# Altium PCB DSP_Board_AJA.PcbDoc
Units mil, origin at the board's own origin, x right, y up, seen from the top; angles counter-clockwise.
Board outline 6000 x 4000 mil, 2 copper layers (Top Layer, Bottom Layer); 126 components, 154 nets, 530 pads, 50 vias.
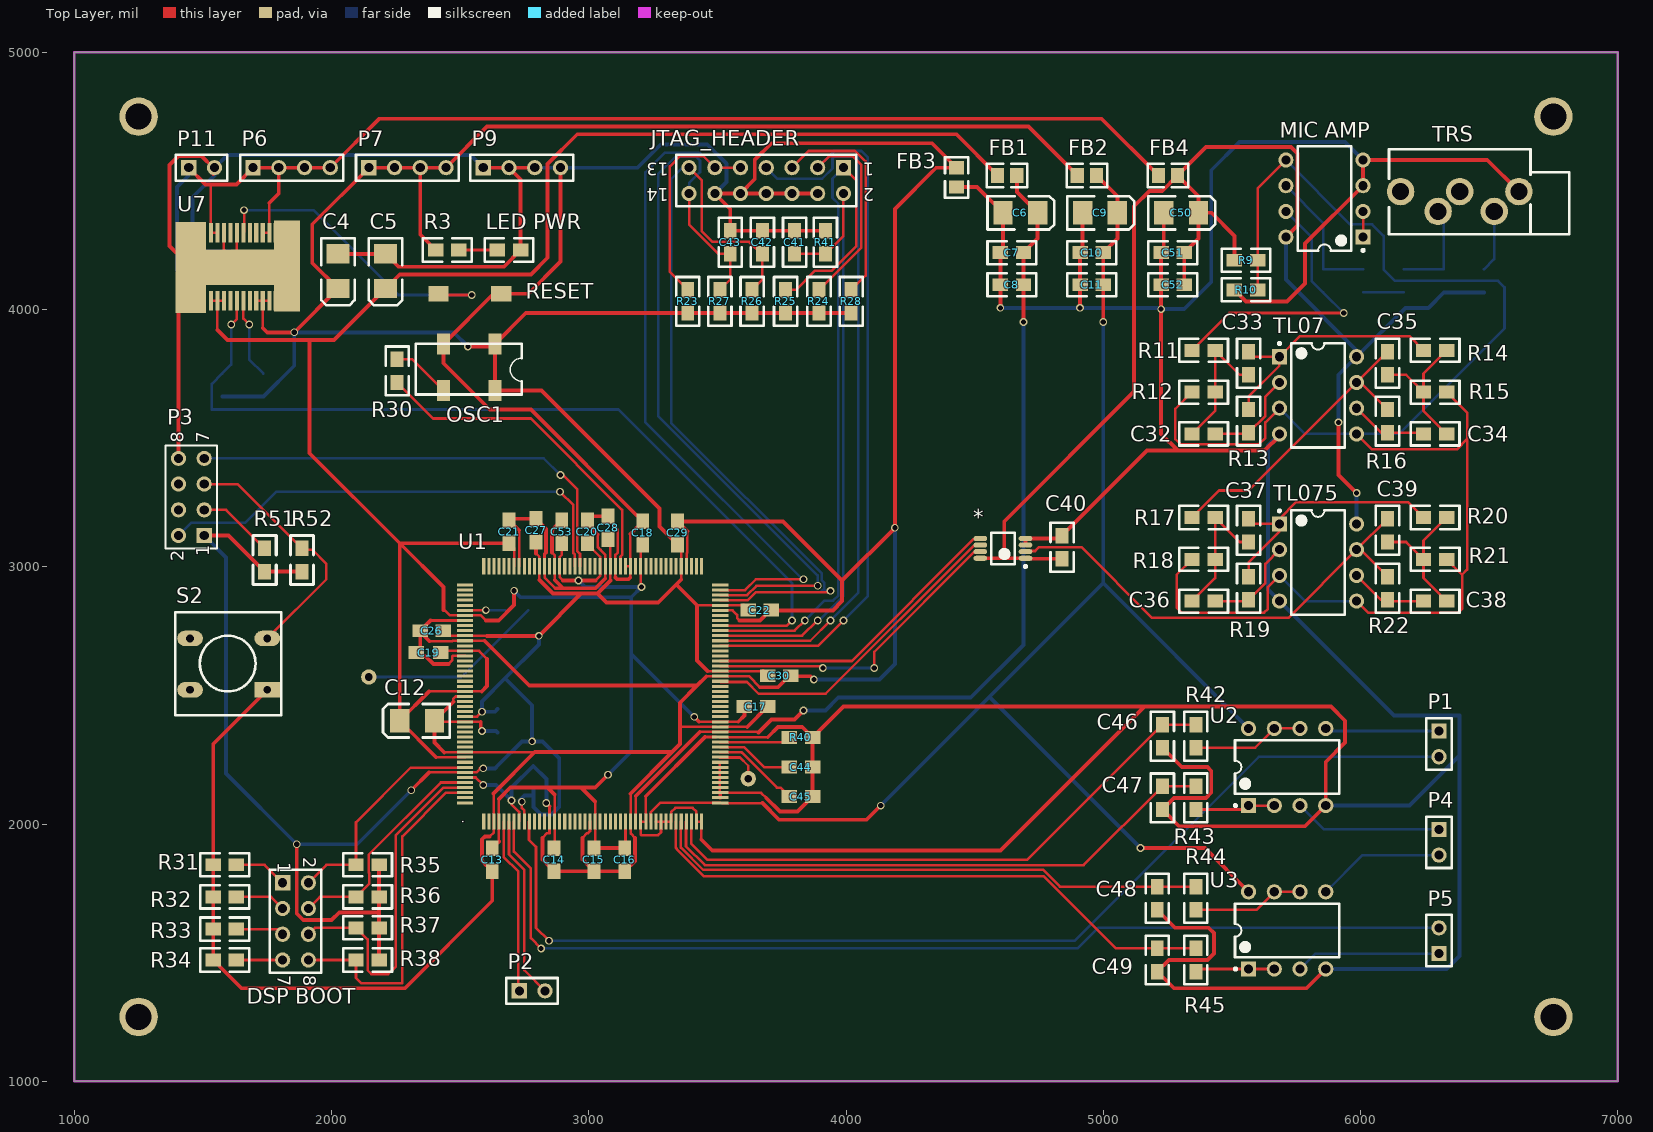
[diagram p0: Top Layer view]
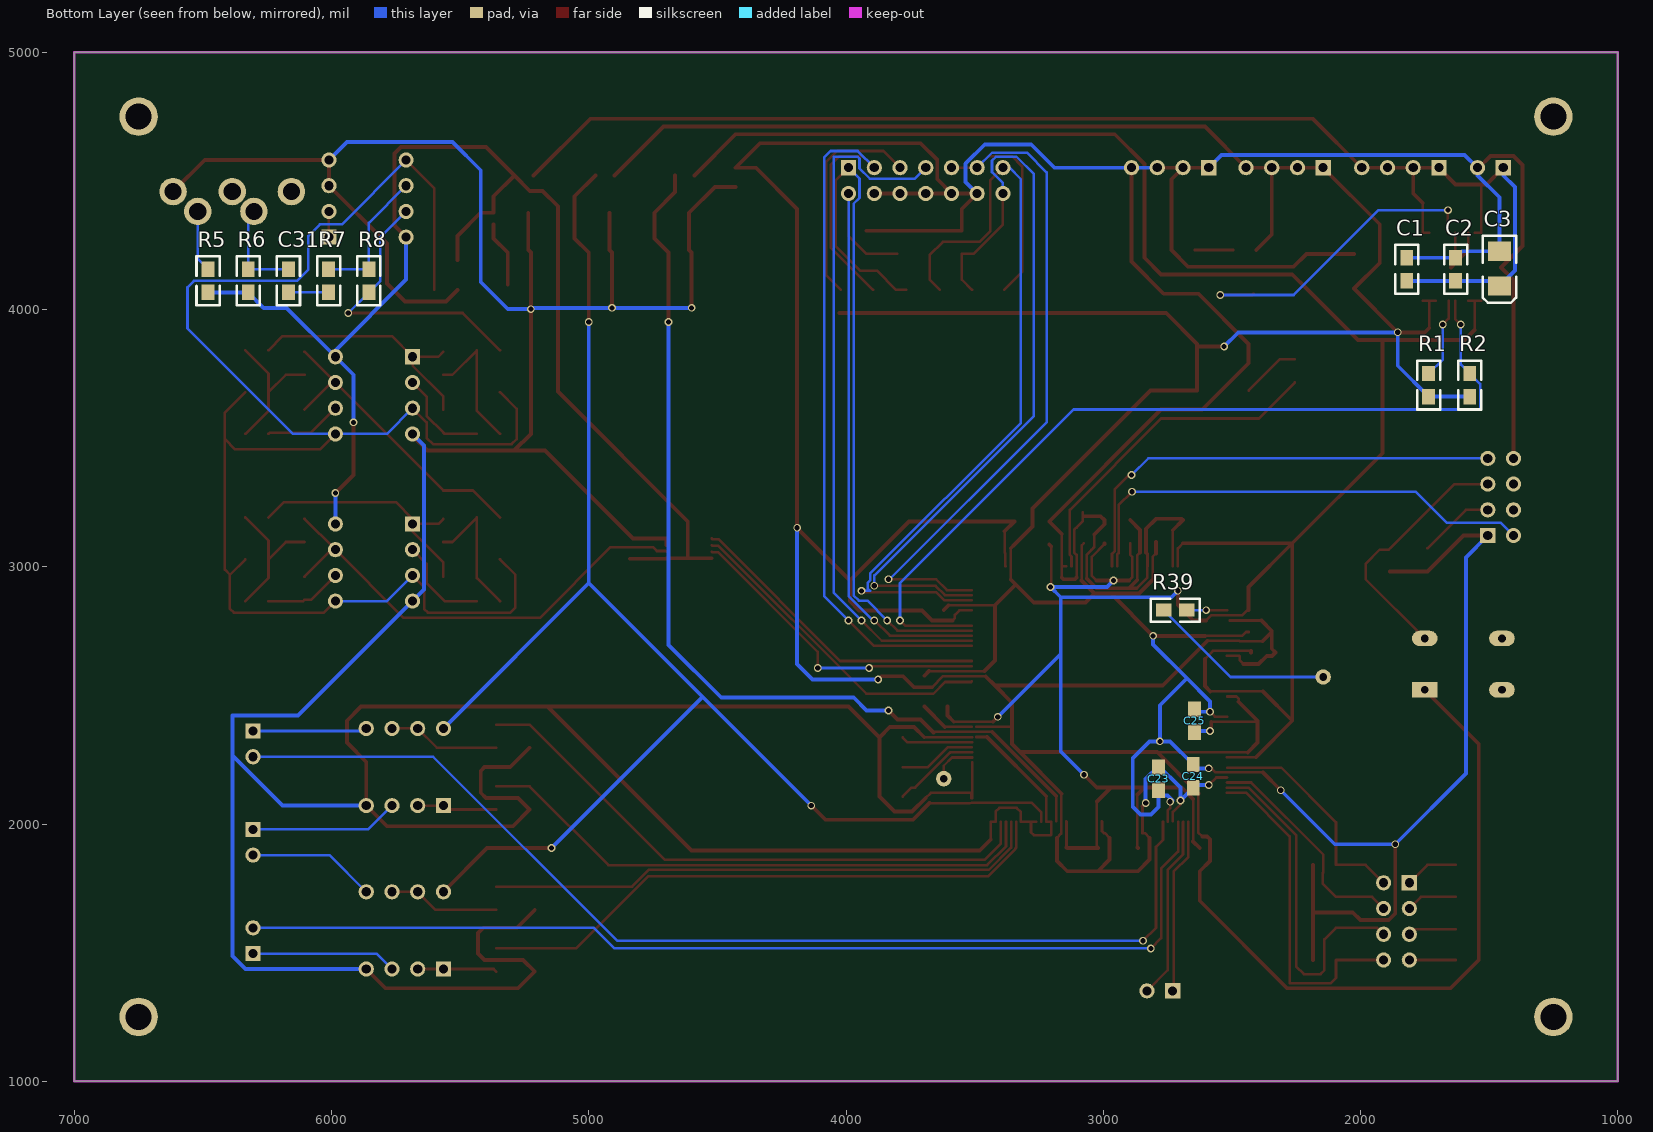
[diagram p1: Bottom Layer view, seen from below]

## Layer stack, top to bottom
Top Solder: solder mask 0.4, Solder Resist, Dk 3.5
Top Layer: signal copper 1.4
Dielectric 1: dielectric 12.6, FR-4, Dk 4.8
Bottom Layer: signal copper 1.4
Bottom Solder: solder mask 0.4, Solder Resist, Dk 3.5

## Board outline
1000,1000 1000,5000 7000,5000 7000,1000

## Design rules (kind name [scope] priority, off if disabled: settings)
Clearance [All] p1: gap=6 ignorepadtopadclearanceinfootprint=TRUE
PolygonConnect [All] p1: connectstyle=Relief reliefconductorwidth=10 reliefentries=4 polygonreliefangle="90 Angle" airgapwidth=10
RoutingVias [All] p1: holewidth=28 width=50 viastyle="Through Hole" minholewidth=28 minwidth=50 maxholewidth=28 maxwidth=50
SMDNeckDown [All] p1: percent=95.000
SolderMaskExpansion [All] p1: expansion=4
Width "Schematic Width Constraint_7" [InNet('+A5.0V')] p1: maxlimit=15 minlimit=10 preferedwidth=15
Width "Schematic Width Constraint_6" [InNet('+D1.8V')] p2: maxlimit=15 minlimit=10 preferedwidth=15
Width "Schematic Width Constraint_5" [InNet('GND')] p3: maxlimit=15 minlimit=10 preferedwidth=15
Width "Schematic Width Constraint_4" [InNet('+D3.3V')] p4: maxlimit=15 minlimit=10 preferedwidth=15
Width "Schematic Width Constraint_3" [InNet('+A3.3V')] p5: maxlimit=15 minlimit=10 preferedwidth=15
Width "Schematic Width Constraint_2" [InNet('AGND')] p6: maxlimit=15 minlimit=10 preferedwidth=15
Width "Schematic Width Constraint_1" [InNet('+A1.8V')] p7: maxlimit=15 minlimit=10 preferedwidth=15
Width "Schematic Width Constraint" [InNet('+D5.0V')] p8: maxlimit=15 minlimit=10 preferedwidth=15
Width [All] p9: maxlimit=10 minlimit=10 preferedwidth=10
30 further rules are at their usual default settings.

## Classes and differential pairs
component class Audio_ADC: * C31 C32 C33 C34 C35 C36 C37 C38 C39 C40 "MIC AMP" R5 R6 R7 R8 R9 R10 R11 R12 R13 R14 R15 R16 R17 R18 R19 R20 R21 R22 TL07 TL075 TRS
component class DSP_Board_Headers: C46 C47 C48 C49 P1 P2 P3 P4 P5 P6 P7 P9 P11 R42 R43 R44 R45 R51 R52 S2 U2 U3
component class DSP_Power: C1 C2 C3 C4 C5 C6 C7 C8 C9 C10 C11 C12 C13 C14 C15 C16 C17 C18 C19 C20 C21 C22 C23 C24 C25 C26 C27 C28 C29 C30 C50 C51 C52 C53 FB1 FB2 FB3 FB4 "LED PWR" R1 R2 R3 RESET U7
component class TMS320F28335_DSP: C41 C42 C43 C44 C45 "DSP BOOT" JTAG_HEADER OSC1 R23 R24 R25 R26 R27 R28 R30 R31 R32 R33 R34 R35 R36 R37 R38 R39 R40 R41 U1
net class XA[0..19]: XA0 XA1 XA2 XA3 XA4 XA5 XA6 XA7 XA8 XA9 XA10 XA11 XA12 XA13 XA14 XA15 XA16 XA17 XA18 XA19
net class XD[0..15]: XD0 XD1 XD2 XD3 XD4 XD5 XD6 XD7 XD8 XD9 XD10 XD11 XD12 XD13 XD14 XD15

## Components (designator, comment, footprint, x,y, rotation, side; value= is the part's Value field where it differs from the comment)
* "ADS8320" TSOP65P490X110-8N 4610,3071.4 r180 top
C1 "Cap Semi" 0805#1 1820,4201.4 r270 bottom value=0.1uF
C2 "Cap Semi" 0805#1 1630,4201.4 r270 bottom value=0.1uF
C3 "10uF" 3528 1460,4091.4 r90 bottom
C4 "10uF" 3528 2025,4081.4 r90 top
C5 "10uF" 3528 2210,4081.4 r90 top
C6 "10uF" 3528 4745,4376.21 r180 top
C7 "Cap Semi" 0805#1 4600,4221.21 r0 top value=0.1uF
C8 "Cap Semi" 0805#1 4600,4096.21 r0 top value=1nF
C9 "10uF" 3528 5055,4376.21 r180 top
C10 "Cap Semi" 0805#1 4910,4221.21 r0 top value=0.1uF
C11 "Cap Semi" 0805#1 4910,4096.21 r0 top value=1nF
C12 "10uF" 3528 2265,2401.4 r0 top
C13 "Cap Semi" 0805#1 2625,1816.4 r90 top value=0.1uF
C14 "Cap Semi" 0805#1 2865,1816.4 r90 top value=0.1uF
C15 "Cap Semi" 0805#1 3020,1816.4 r90 top value=0.1uF
C16 "Cap Semi" 0805#1 3140,1816.4 r90 top value=0.1uF
C17 "Cap Semi" 0805#1 3695,2456.4 r180 top value=0.1uF
C18 "Cap Semi" 0805#1 3210,3176.4 r270 top value=0.1uF
C19 "Cap Semi" 0805#2 2330,2666.4 r0 top value=0.1uF
C20 "Cap Semi" 0805#1 2995,3181.4 r270 top value=0.1uF
C21 "Cap Semi" 0805#1 2690,3181.4 r270 top value=0.1uF
C22 "Cap Semi" 0805#1 3710,2831.4 r180 top value=0.1uF
C23 "Cap Semi" 0805#1 2785,2221.4 r270 bottom value=0.1uF
C24 "Cap Semi" 0805#1 2650,2141.4 r90 bottom value=0.1uF
C25 "Cap Semi" 0805#1 2645,2356.4 r90 bottom value=0.1uF
C26 "Cap Semi" 0805#1 2345,2751.4 r0 top value=0.1uF
C27 "Cap Semi" 0805#1 2795,3186.4 r270 top value=0.1uF
C28 "Cap Semi" 0805#1 3075,3196.4 r270 top value=0.1uF
C29 "Cap Semi" 0805#1 3345,3176.4 r270 top value=0.1uF
C30 "Cap Semi" 0805#1 3785,2576.4 r180 top value=0.1uF
C31 "Cap Semi" 0805#1 6167.5,4156.4 r270 bottom value=4.7uF
C32 "Cap Semi" 0805#1 5345,3516.4 r0 top value=10nF
C33 "Cap Semi" 0805#1 5565,3746.4 r90 top value=10nF
C34 "Cap Semi" 0805#1 6335,3516.4 r180 top value=10nF
C35 "Cap Semi" 0805#1 6105,3746.4 r90 top value=10nF
C36 "Cap Semi" 0805#1 5345,2866.4 r0 top value=10nF
C37 "Cap Semi" 0805#1 5565,3096.4 r90 top value=10nF
C38 "Cap Semi" 0805#1 6335,2866.4 r180 top value=10nF
C39 "Cap Semi" 0805#1 6105,3096.4 r90 top value=10nF
C40 "Cap Semi" 0805#1 4840,3031.4 r90 top value=0.1uF
C41 "Cap Semi" 0805#1 3800,4306.4 r270 top value=0.1uF
C42 "Cap Semi" 0805#1 3675,4306.4 r270 top value=0.1uF
C43 "Cap Semi" 0805#1 3550,4306.4 r270 top value=0.1uF
C44 "Cap Semi" 0805#1 3780,2221.4 r0 top value=2.2uF
C45 "Cap Semi" 0805#1 3780,2106.4 r0 top value=2.2uF
C46 "Cap Semi" 0805#1 5230,2296.4 r90 top value=20pF
C47 "Cap Semi" 0805#1 5230,2056.4 r90 top value=20pF
C48 "Cap Semi" 0805#1 5210,1666.4 r90 top value=20pF
C49 "Cap Semi" 0805#1 5210,1426.4 r90 top value=20pF
C50 "10uF" 3528 5370,4376.21 r180 top
C51 "Cap Semi" 0805#1 5225,4221.21 r0 top value=0.1uF
C52 "Cap Semi" 0805#1 5225,4096.21 r0 top value=1nF
C53 "Cap Semi" 0805#1 2895,3181.4 r270 top value=0.1uF
"DSP BOOT" "Header 4X2" HDR2X4 1810,1771.4 r270 top
FB1 "Ferrite_Bead" CR2012-0805 4626.68,4521.21 r0 top
FB2 "Ferrite_Bead" CR2012-0805 4936.68,4521.21 r0 top
FB3 "Ferrite_Bead" CR2012-0805 4430,4514 r270 top
FB4 "Ferrite_Bead" CR2012-0805 5251.68,4521.21 r0 top
JTAG_HEADER "Header 7X2" HDR2X7 3990,4551.4 r180 top
"LED PWR" "LED3" 0805#1 2645,4231.4 r0 top
"MIC AMP" "TL072" DIP-8 5860,4431.4 r180 top
OSC1 "Epson Oscillator" Oscillator 2635,3866.4 r180 top
P1 "Header 2" HDR1X2 6305,2361.4 r270 top
P2 "Header 2" HDR1X2 2730,1351.4 r0 top
P3 "Header 4X2" HDR2X4 1505,3121.4 r90 top
P4 "Header 2" HDR1X2 6305,1978.9 r270 top
P5 "Header 2" HDR1X2 6305,1496.4 r90 top
P6 "Header 4" HDR1X4 1695,4551.4 r0 top
P7 "Header 4" HDR1X4 2145,4551.4 r0 top
P9 "Header 4" HDR1X4 2590,4551.4 r0 top
P11 "Header 2" HDR1X2 1445,4551.4 r0 top
R1 "Res" 0805#1 1735,3751.4 r270 bottom value=240k
R2 "Res" 0805#1 1575,3751.4 r270 bottom value=240k
R3 "Res" 0805#1 2405,4231.4 r0 top value=1k
R5 "Res" 0805#1 6480,4066.4 r90 bottom value=5.1K
R6 "Res" 0805#1 6323.75,4156.4 r270 bottom value=4.7K
R7 "Res" 0805#1 6011.25,4156.4 r270 bottom value=1K
R8 "Res" 0805#1 5855,4066.4 r90 bottom value=270K
R9 "Res" 0805#1 5600,4191.4 r180 top value=47K
R10 "Res" 0805#1 5510,4076.4 r0 top value=47K
R11 "Res" 0805#1 5435,3841.4 r180 top value=23.2K
R12 "Res" 0805#1 5435,3678.9 r180 top value=11.3K
R13 "Res" 0805#1 5565,3611.4 r270 top value=78.7K
R14 "Res" 0805#1 6335,3841.4 r180 top value=10k
R15 "Res" 0805#1 6335,3678.9 r180 top value=4.87K
R16 "Res" 0805#1 6105,3611.4 r270 top value=34K
R17 "Res" 0805#1 5435,3191.4 r180 top value=19.1K
R18 "Res" 0805#1 5345,3028.9 r0 top value=4.75K
R19 "Res" 0805#1 5565,2961.4 r270 top value=383K
R20 "Res" 0805#1 6335,3191.4 r180 top value=3.32K
R21 "Res" 0805#1 6335,3028.9 r180 top value=825
R22 "Res" 0805#1 6105,2961.4 r270 top value=66.5K
R23 "Res" 0805#1 3385,4076.4 r270 top value=10k
R24 "Res" 0805#1 3895,4076.4 r270 top value=10k
R25 "Res" 0805#1 3765,4076.4 r270 top value=10k
R26 "Res" 0805#1 3635,3986.4 r90 top value=2.2k
R27 "Res" 0805#1 3510,4076.4 r270 top value=2.2k
R28 "Res" 0805#1 4020,4076.4 r270 top value=100
R30 "Res" 0805#1 2255,3806.4 r270 top value=20
R31 "Res" 0805#1 1630,1841.4 r180 top value=2.2k
R32 "Res" 0805#1 1630,1716.4 r180 top value=2.2k
R33 "Res" 0805#1 1630,1591.4 r180 top value=2.2k
R34 "Res" 0805#1 1630,1471.4 r180 top value=2.2k
R35 "Res" 0805#1 2185,1841.4 r180 top value=20k
R36 "Res" 0805#1 2185,1716.4 r180 top value=20k
R37 "Res" 0805#1 2185,1596.4 r180 top value=20k
R38 "Res" 0805#1 2185,1471.4 r180 top value=20k
R39 "Res" 0805#1 2675,2831.4 r0 bottom value=20
R40 "Res" 0805#1 3870,2336.4 r180 top value=22k
R41 "Res" 0805#1 3920,4216.4 r90 top value=2.2k
R42 "Res" 0805#1 5360,2296.4 r90 top value=100
R43 "Res" 0805#1 5360,2056.4 r90 top value=100
R44 "Res" 0805#1 5360,1666.4 r90 top value=100
R45 "Res" 0805#1 5360,1426.4 r90 top value=100
R51 "Res" 0805#1 1740,2981.4 r90 top value=100
R52 "Res" 0805#1 1885,3071.4 r270 top value=100
RESET "SW-PB" SWITCH_2PAD_SMD 2660,4061.4 r180 top
S2 "SW-PB" "SW PB" 1750,2521.4 r180 top
TL07 "BPFS1" DIP-8 5835,3666.4 r0 top
TL075 "BPFS3" DIP-8 5835,3016.4 r0 top
TRS "3.5mm jack GM" "3.5mm jack GM" 6616,4458.4 r90 top
U1 "TMS320F28335GF" QFP176 3015,2505.7 r90 top
U2 "LT1632CN8" DIP-8 5715,2221.4 r90 top
U3 "LT1632CN8" DIP-8 5715,1586.4 r90 top
U7 "TPS70351" PWP24 1640,4166.4 r270 top

## Footprints (in the part's own frame and the unit in brackets; to place one, negate y for a bottom-side part, rotate by r counter-clockwise, add the part's x,y. Pads: shape width x height; smd on the part's side, far side on the other; paste and mask are expansions set on the pad)
"3.5mm jack GM" [mil]
  round 106.5 hole 66.5: 1(0,0) 2(-77,96) 3(0,230) 4(-77,314) 5(0,460)
  silkscreen extent -165,-195 165,505
0805#1 [mil]
  rect 60x50 smd: 1(0,0) 2(90,0)
  silkscreen extent -50,-45 140,45
0805#2 [mil]
  rect 60x50 smd: 1(0,0) 2(95,0)
3528 [mil]
  rect 75x90 smd: 1(0,0) 2(135,0)
  silkscreen extent -65,-65 195,65
CR2012-0805 [mm]
  rect 1.3x1.5 smd: 1(-0.95,0) 2(0.95,0)
  silkscreen extent -2,-1.15 2,1.15
DIP-8 [mm] "DIP; 8 Leads; Row Spacing 7.62 mm; Pitch 2.54 mm"
  rect 1.5x1.5 hole 0.9: 1(-3.81,3.81)
  round 1.5 hole 0.9: 2(-3.81,1.27) 3(-3.81,-1.27) 4(-3.81,-3.81) 5(3.81,-3.81) 6(3.81,-1.27) 7(3.81,1.27) 8(3.81,3.81)
  silkscreen extent -3.94,-5.15 2.65,5.23, body extent -3.6,-5.15 3.6,5.15, height 5.08
HDR1X2 [mm] "Connector; Header; 2 Position"
  rect 1.5x1.5 hole 0.9: 1(0,0)
  round 1.5 hole 0.9: 2(2.54,0)
  silkscreen extent -1.27,-1.27 3.81,1.27
HDR1X4 [mm] "Connector; Header; 4 Position"
  rect 1.5x1.5 hole 0.9: 1(0,0)
  round 1.5 hole 0.9: 2(2.54,0) 3(5.08,0) 4(7.62,0)
  silkscreen extent -1.27,-1.27 8.89,1.27
HDR2X4 [mm] "Connector; Header; 4x2 Position"
  rect 1.5x1.5 hole 0.9: 1(0,0)
  round 1.5 hole 0.9: 2(0,2.54) 3(2.54,0) 4(2.54,2.54) 5(5.08,0) 6(5.08,2.54) 7(7.62,0) 8(7.62,2.54)
  silkscreen extent -1.27,-1.27 8.89,3.81
HDR2X7 [mm] "Connector; Header; 7x2 Position"
  rect 1.5x1.5 hole 0.9: 1(0,0)
  round 1.5 hole 0.9: 2(0,2.54) 3(2.54,0) 4(2.54,2.54) 5(5.08,0) 6(5.08,2.54) 7(7.62,0) 8(7.62,2.54) 9(10.16,0) 10(10.16,2.54) 11(12.7,0) 12(12.7,2.54) 13(15.24,0) 14(15.24,2.54)
  silkscreen extent -1.27,-1.27 16.51,3.81
Oscillator [mm]
  rect 1.3x2.1 smd: 1(0,0) 2(5.08,0) 3(5.08,4.6) 4(0,4.6)
  silkscreen extent -2.67,0 7.83,5
PWP24 [mm]
  rect 1.95x0.4 smd: 1(-3.366,3.632) 2(-3.365,2.997) 3(-3.365,2.352) 4(-3.365,1.712) 5(-3.365,1.072) 6(-3.365,0.432) 7(-3.365,-0.208) 8(-3.365,-0.848) 9(-3.365,-1.488) 10(-3.365,-2.128) 11(-3.365,-2.768) 12(-3.365,-3.48) 13(3.366,-3.48) 14(3.358,-2.768) 15(3.358,-2.128) 16(3.358,-1.488) 17(3.358,-0.848) 18(3.358,-0.208) 19(3.358,0.432) 20(3.358,1.072) 21(3.358,1.712) 22(3.358,2.352) 23(3.366,2.997) 24(3.366,3.632)
  rect 9x2.54 smd: 1(-0.064,4.75)
  rect 3.5x7.9 smd: 1(0.063,0.203)
  rect 9x3 smd: 1(0.064,-4.75)
QFP176 [mil]
  rect 63x11.8 smd: 1(-496.1,423.2) 2(-496.1,403.5) 3(-496.1,383.9) 4(-496.1,364.2) 5(-496.1,344.5) 6(-496.1,324.8) 7(-496.1,305.1) 8(-496.1,285.4) 9(-496.1,265.7) 10(-496.1,246.1) 11(-496.1,226.4) 12(-496.1,206.7) 13(-496.1,187) 14(-496.1,167.3) 15(-496.1,147.6) 16(-496.1,128) 17(-496.1,108.3) 18(-496.1,88.6) 19(-496.1,68.9) 20(-496.1,49.2) 21(-496.1,29.5) 22(-496.1,9.8) 23(-496.1,-9.8) 24(-496.1,-29.5) 25(-496.1,-49.2) 26(-496.1,-68.9) 27(-496.1,-88.6) 28(-496.1,-108.3) 29(-496.1,-128) 30(-496.1,-147.6) 31(-496.1,-167.3) 32(-496.1,-187) 33(-496.1,-206.7) 34(-496.1,-226.4) 35(-496.1,-246.1) 36(-496.1,-265.7) 37(-496.1,-285.4) 38(-496.1,-305.1) 39(-496.1,-324.8) 40(-496.1,-344.5) 41(-496.1,-364.2) 42(-496.1,-383.9) 43(-496.1,-403.5) 44(-496.1,-423.2) 89(496.1,-423.2) 90(496.1,-403.5) 91(496.1,-383.9) 92(496.1,-364.2) 93(496.1,-344.5) 94(496.1,-324.8) 95(496.1,-305.1) 96(496.1,-285.4) 97(496.1,-265.7) 98(496.1,-246.1) 99(496.1,-226.4) 100(496.1,-206.7) 101(496.1,-187) 102(496.1,-167.3) 103(496.1,-147.6) 104(496.1,-128) 105(496.1,-108.3) 106(496.1,-88.6) 107(496.1,-68.9) 108(496.1,-49.2) 109(496.1,-29.5) 110(496.1,-9.8) 111(496.1,9.8) 112(496.1,29.5) 113(496.1,49.2) 114(496.1,68.9) 115(496.1,88.6) 116(496.1,108.3) 117(496.1,128) 118(496.1,147.6) 119(496.1,167.3) 120(496.1,187) 121(496.1,206.7) 122(496.1,226.4) 123(496.1,246.1) 124(496.1,265.7) 125(496.1,285.4) 126(496.1,305.1) 127(496.1,324.8) 128(496.1,344.5) 129(496.1,364.2) 130(496.1,383.9) 131(496.1,403.5) 132(496.1,423.2)
  rect 11.8x63 smd: 45(-423.2,-496.1) 46(-403.5,-496.1) 47(-383.9,-496.1) 48(-364.2,-496.1) 49(-344.5,-496.1) 50(-324.8,-496.1) 51(-305.1,-496.1) 52(-285.4,-496.1) 53(-265.7,-496.1) 54(-246.1,-496.1) 55(-226.4,-496.1) 56(-206.7,-496.1) 57(-187,-496.1) 58(-167.3,-496.1) 59(-147.6,-496.1) 60(-128,-496.1) 61(-108.3,-496.1) 62(-88.6,-496.1) 63(-68.9,-496.1) 64(-49.2,-496.1) 65(-29.5,-496.1) 66(-9.8,-496.1) 67(9.8,-496.1) 68(29.5,-496.1) 69(49.2,-496.1) 70(68.9,-496.1) 71(88.6,-496.1) 72(108.3,-496.1) 73(128,-496.1) 74(147.6,-496.1) 75(167.3,-496.1) 76(187,-496.1) 77(206.7,-496.1) 78(226.4,-496.1) 79(246.1,-496.1) 80(265.7,-496.1) 81(285.4,-496.1) 82(305.1,-496.1) 83(324.8,-496.1) 84(344.5,-496.1) 85(364.2,-496.1) 86(383.9,-496.1) 87(403.5,-496.1) 88(423.2,-496.1) 133(423.2,496.1) 134(403.5,496.1) 135(383.9,496.1) 136(364.2,496.1) 137(344.5,496.1) 138(324.8,496.1) 139(305.1,496.1) 140(285.4,496.1) 141(265.7,496.1) 142(246.1,496.1) 143(226.4,496.1) 144(206.7,496.1) 145(187,496.1) 146(167.3,496.1) 147(147.6,496.1) 148(128,496.1) 149(108.3,496.1) 150(88.6,496.1) 151(68.9,496.1) 152(49.2,496.1) 153(29.5,496.1) 154(9.8,496.1) 155(-9.8,496.1) 156(-29.5,496.1) 157(-49.2,496.1) 158(-68.9,496.1) 159(-88.6,496.1) 160(-108.3,496.1) 161(-128,496.1) 162(-147.6,496.1) 163(-167.3,496.1) 164(-187,496.1) 165(-206.7,496.1) 166(-226.4,496.1) 167(-246.1,496.1) 168(-265.7,496.1) 169(-285.4,496.1) 170(-305.1,496.1) 171(-324.8,496.1) 172(-344.5,496.1) 173(-364.2,496.1) 174(-383.9,496.1) 175(-403.5,496.1) 176(-423.2,496.1)
"SW PB" [mil]
  rect 100x60 hole 30: 1(0,0)
  oval 100x60 hole 30: 2(0,-200) 3(300,-200) 4(300,0)
  silkscreen extent -55,-302 358,98
SWITCH_2PAD_SMD [mm]
  rect 2x1.5 smd: 1(0,0) 2(6.2,0)
TSOP65P490X110-8N [mm] "TSOP, 8-Leads, Body 3.00x3.00mm, Pitch 0.65mm, IPC Medium Density"
  oval 1.35x0.5 smd: 1(-2.225,0.975) 2(-2.225,0.325) 3(-2.225,-0.325) 4(-2.225,-0.975) 5(2.225,-0.975) 6(2.225,-0.325) 7(2.225,0.325) 8(2.225,0.975)
  silkscreen extent -2.35,-1.55 1.15,1.9, body extent -1.55,-1.55 1.55,1.55, height 1.1

## Part data
C1 C2 C7 C8 C10 C11 C13 C14 C15 C16 C17 C18 C19 C20 C21 C22 C23 C24 C25 C26 C27 C28 C29 C30 C31 C32 C33 C34 C35 C36 C37 C38 C39 C40 C41 C42 C43 C44 C45 C46 C47 C48 C49 C51 C52 C53: "Capacitor (Semiconductor SIM Model)", LatestRevisionDate=17-Jul-2002, LatestRevisionNote="Re-released for DXP Platform.", PackageReference=C1206, Published=8-Jun-2000, Publisher="Altium Limited"
C3: library part "CAPACITOR POL", "digi-399-1563-1-ND"
C4 C6 C9 C50: library part "CAPACITOR POL", "digi-399-3096-1-ND"
C5 C12: library part "CAPACITOR POL", "digi-399-1576-1-ND"
"DSP BOOT" P3: "Header, 4-Pin, Dual row", LatestRevisionDate=17-Jul-2002, LatestRevisionNote="Re-released for DXP Platform.", Publisher="Altium Limited"
FB1 FB2 FB3 FB4: "Ferrite Bead", Digikey #=445-1554-1-ND
JTAG_HEADER: "Header, 7-Pin, Dual row", LatestRevisionDate=17-Jul-2002, LatestRevisionNote="Re-released for DXP Platform.", Publisher="Altium Limited"
"LED PWR": "Typical BLUE SiC LED", PackageDocument=16-Apr-2002, DatasheetDocument=16-Apr-2002, LatestRevisionDate=17-Dec-2003, LatestRevisionNote="PCB Footprint replaced.", PackageReference=3.5X2.8X1.9, Published=8-Jun-2000, Publisher="Altium Limited"
"MIC AMP" TL07 TL075: library part LT1632CN8, "45MHz, 45V/µs, Dual Rail-to-Rail Input and Output Precision Operational Amplifier", ComponentLink1Description="Manufacturer Link", ComponentLink1URL=http://www.linear.com/, ComponentLink2Description=Datasheet, ComponentLink2URL=http://www.linear.com/pc/downloadDocument.do?navId=H0,C1,C1154,C1009,C1022,P1642,D3055, DatasheetVersion=1996, LatestRevisionDate=29-May-2009, LatestRevisionNote="Component Body Added.", Note=1455, PackageDescription="DIP, Plastic, 8-Pin, Row Spacing 7.62 mm, Pitch 2.54 mm", PackageReference=N8, PackageVersion="N8 1002", Published=8-Jun-2000, Publisher="Altium Limited"
OSC1: library part Oscillator, "15Mhz Epson Clock", Digikey #=SE2826CT-ND
P1 P2 P4 P5 P11: "Header, 2-Pin", LatestRevisionDate=17-Jul-2002, LatestRevisionNote="Re-released for DXP Platform.", Publisher="Altium Limited"
P6 P7 P9: "Header, 4-Pin", LatestRevisionDate=17-Jul-2002, LatestRevisionNote="Re-released for DXP Platform.", Publisher="Altium Limited"
R1 R2 R3 R5 R6 R7 R8 R9 R10 R11 R12 R13 R14 R15 R16 R17 R18 R19 R20 R21 R22 R23 R24 R25 R26 R27 R28 R30 R31 R32 R33 R34 R35 R36 R37 R38 R39 R40 R41 R42 R43 R44 R45 R51 R52: library part "Res Semi", "Semiconductor Resistor", LatestRevisionDate=17-Jul-2002, LatestRevisionNote="Re-released for DXP Platform.", PackageReference=AXIAL-0.5, Published=8-Jun-2000, Publisher="Altium Limited"
RESET: "Switch", Digikey #=CKN9119CT-ND, LatestRevisionDate=17-Jul-2002, LatestRevisionNote="Re-released for DXP Platform.", PackageReference=SPST-2, Published=24-Mar-1999, Publisher="Altium Limited"
S2: library part SW-PB_2, "DIGIKEY SW400-ND", LatestRevisionDate=17-Jul-2002, LatestRevisionNote="Re-released for DXP Platform.", Published=24-Mar-1999, Publisher="Altium Limited"
U1: library part TMS320F283XXPGF_23, "Texas Instruments F28335", Digikey #=296-23660-ND
U2 U3: "45MHz, 45V/µs, Dual Rail-to-Rail Input and Output Precision Operational Amplifier", ComponentLink1Description="Manufacturer Link", ComponentLink1URL=http://www.linear.com/, ComponentLink2Description=Datasheet, ComponentLink2URL=http://www.linear.com/pc/downloadDocument.do?navId=H0,C1,C1154,C1009,C1022,P1642,D3055, DatasheetVersion=1996, LatestRevisionDate=29-May-2009, LatestRevisionNote="Component Body Added.", Note=1455, PackageDescription="DIP, Plastic, 8-Pin, Row Spacing 7.62 mm, Pitch 2.54 mm", PackageReference=N8, PackageVersion="N8 1002", Published=8-Jun-2000, Publisher="Altium Limited"
U7: "IC 3.3V/1.8V LDO REG 24-HTSSOP", Digikey #=296-8024-5-ND

## Free pads (board coordinates)
  round 60 hole 30: 13(3620,2176.4) 14(2145,2571.4)
  round 150 hole 100: 15(1250,4750) 16(1250,1250) 17(6750,1250) 18(6750,4750)

## Via types
v1: diameter 30, hole 20, Top Layer to Bottom Layer, 50 vias

## Nets (pads, with @x,y where several pads share a name; then routed paths per layer and width w, separated by ;. In a path a pad name is that pad's centre, name@x,y a point inside that pad or via, vN(x,y) a via of type N, cw(c..) or ccw(c..) an arc to the next point about the centre after c; other vN are vias at no path point)
+A1.8V: C6.1 C7.2 C8.2 FB1.2 U1.31 U1.59 | length 3731.9
  Top Layer w10: U1.31@3182.6,2009.9 3182.6,2109 ; 3431.4,2357.8 U1.59@3510.8,2357.8 ; U1.59 3511.4,2357.8 3658.6,2357.8 3660,2356.4
  Top Layer w15: 3182.6,2109 3431.4,2357.8 ; 3660,2356.4 3710,2406.4 3800,2406.4 v1(3835,2441.4) ; FB1.2 4664.08,4457.13 C6.1 4745,4276.21 C7.2 C8.2 v1(4690,3951.4)
  Bottom Layer w15: v1(3835,2441.4) 3920,2441.4 3970,2491.4 4485,2491.4 4690,2696.4 v1(4690,3951.4)
+A2.5V: "MIC AMP.5" R9.1 R10.2 R12.2 R15.1 R18.1 R21.1 TL07.3 TL07.5 TL075.3 TL075.5 | length 6590.8
  Top Layer w10: R18.1 5285,2968.9 5285,2841.4 5305,2821.4 5625,2821.4 5640,2836.4 5640,2920.95 5685,2965.95 TL075.3 ; R12.2 5280,3613.9 5280,3496.4 5300,3476.4 5605,3476.4 5630,3501.4 5630,3560.95 5685,3615.95 TL07.3 ; R10.2 R9.1 5600,4471.4 5710,4581.4 ; TL075.5 6030,2821.4 6380,2821.4 6395,2836.4 6395,2968.9 ; TL07.5 6045,3456.4 6375,3456.4 6415,3496.4 ; R21.1 6395,2968.9 ; R15.1 6415,3598.9 6415,3496.4 ; 6395,2968.9 6415,2988.9 6415,3496.4
  Bottom Layer w10: TL075.3 5785,2866.4 TL075.5 ; TL07.3 5785,3516.4 TL07.5 6150,3516.4 6560,3926.4 6560,4086.4 6535,4111.4 6135,4111.4 6090,4156.4 6090,4286.4 6045,4331.4 5960,4331.4 5710,4581.4
+A3.3V: C9.1 C10.2 C11.2 FB2.2 U1.34 U1.45 U2.8 U3.8 | length 5972.4
  Top Layer w10: U1.34 3241.5,2009.7 3241.5,2046.49 3277.51,2082.5 U1.45 ; U1.45@3519.9,2081.4 3675,2081.4
  Top Layer w15: 3675,2081.4 3740,2016.4 4080,2016.4 v1(4135,2071.4) ; FB2.2 5055,4440.28 C9.1 5055,4276.21 C10.2 C11.2 v1(5000,3951.4) ; v1(5145,1906.4) 5395,1906.4 U3.8
  Bottom Layer w15: v1(4135,2071.4) 4555,2491.4 ; v1(5000,3951.4) 5000,2936.4 ; v1(5145,1906.4) 4560,2491.4 4555,2491.4 ; U2.8 5000,2936.4 ; 4555,2491.4 5000,2936.4
+A5.0V: "MIC AMP.8" *.1 *.8 C40.1 C50.1 C51.2 C52.2 FB4.2 R5.1 R6.2 R9.2 TL07.8 TL075.8 | length 5574.2
  Top Layer w15: *.8 4615,3033.02 ; C40.1 4699.21,3031.4 *.1 4615,3033.02 ; C52.2 C51.2 5370,4276.21 C50.1@5370,4331.4 ; R9.2 5510,4286.4 5420.2,4376.21 C50.1 5370,4440.28 FB4.2 ; 5710,4281.4 5755,4326.4 5755,4606.4 5730,4631.4 5399.27,4631.4 FB4.2 ; v1(5915,3561.4) 5915,3356.4 v1(5985,3286.4) ; 4615,3033.02 4615,3176.4 5120,3681.4 5120,4401.4 5180,4461.4 5229.27,4461.4 FB4.2
  Bottom Layer w15: 5710,4281.4 5710,4116.4 5985,3841.4 TL07.8 ; v1(5915,3561.4) 5915,3746.4 TL07.8 ; TL075.8 v1(5985,3286.4) ; R5.1 R6.2 6263.75,4006.4 6175,4006.4 TL07.8
+D1.8V: C5.1 C12.1 C13.2 C14.2 C15.2 C16.2 C17.2 C18.2 C19.2 C20.2 C21.2 C53.2 FB1.1 U1.4 U1.15 U1.23 U1.29 U1.61 U1.101 U1.109 U1.117 U1.126 U1.139 U1.146 U1.154 U1.167 U7.14 U7.15 U7.16 | length 11804.3
  Top Layer w10: U7.14 U7.15 ; 1556.22,3920.18 U7.15 ; U7.16 U7.15 ; 2379.1,2515.5 U1.154 2584.1,2515.5 ; 2406.8,2259.6 U1.167 ; C19.2@2425,2672.7 2573.7,2672.7 2605,2641.4 ; 2435,2831.4 2440,2831.4 2460.3,2811.1 2493.04,2811.1 2492.74,2810.8 U1.139 2580.3,2810.8 2599.7,2791.4 ; 2650.8,1932.2 U1.4 2650.8,2097.2 ; C21.2 2709.9,3071.5 U1.126 ; C14.2@2867.4,1908.8 U1.15 2867.4,2114 ; U1.117 2887.3,3002.1 2887.3,3038.89 2895,3046.59 C53.2 ; U1.117@2887.3,3001.5 2887.3,2959.1 2900,2946.4 ; C20.2@2995,3088.09 3044.2,3038.89 3044.2,2964.71 3025.89,2946.4 ; U1.23@3024.6,2009.8 3024.6,2086.8 ; C15.2@3024.8,1911.2 U1.23 ; C16.2@3142.7,1909.1 3142.7,2009.3 U1.29 ; U1.101 C18.2@3202,3078.4 ; v1@3202.3,2924.1 U1.101@3202.3,3001.5 ; 3429,2397.4 U1.61 3581,2397.4
  Top Layer w15: 1556.22,3920.18 1595,3881.4 1915,3881.4 ; 2379.1,2515.5 C12.1 ; 2406.8,2259.6 C12.1 ; C19.2 C19.2@2425,2672.7 ; 2435,2831.4 2435,2921.4 2265,3091.4 ; 2584.1,2515.5 2605,2536.4 2605,2641.4 ; 2599.7,2791.4 2599.85,2791.55 2650.15,2791.55 2709.9,2851.3 v1(2709.9,2906.5) ; C13.2 2650.8,1932.2 ; 2650.8,2097.2 2695,2141.4 2840,2141.4 ; C21.2 2265,3091.4 ; C14.2 C14.2@2867.4,1908.8 ; 2867.4,2114 2840,2141.4 ; 2900,2946.4 v1(2960,2946.4) 3025.89,2946.4 ; C20.2@2995,3088.09 C20.2 ; 3024.6,2086.8 2970,2141.4 ; C15.2@3024.8,1911.2 C15.2 C16.2 C16.2@3142.7,1909.1 ; v1(3075,2191.4) 3025,2141.4 2970,2141.4 ; C18.2@3202,3078.4 C18.2 ; v1@3202.3,2924.1 v1(3205,2921.4) ; v1(3410,2416.4) 3429,2397.4 ; 3581,2397.4 3605,2421.4 C17.2 ; FB1.1 4429.08,4681.4 2955,4681.4 2840,4566.4 2840,4201.4 2775,4136.4 2265,4136.4 C5.1 2010,3881.4 1915,3881.4 ; 1915,3881.4 1915,3441.4 2265,3091.4 ; C12.1 2265,3091.4 ; 2840,2141.4 2970,2141.4
  Bottom Layer w15: v1(2709.9,2906.5) 2735,2881.4 3165,2881.4 ; v1(2960,2946.4) 2985,2921.4 v1(3205,2921.4) 3165,2881.4 ; v1(3075,2191.4) 3165,2281.4 3165,2661.4 ; v1(3410,2416.4) 3165,2661.4 ; 3165,2661.4 3165,2881.4
+D3.3V: C4.1 C22.2 C23.2 C24.2 C25.2 C26.2 C27.2 C28.2 C29.2 C30.2 FB2.1 OSC1.1 OSC1.4 P3.1 P7.1 P7.2 P7.3 P7.4 R1.2 R2.2 R3.1 R23.2 R24.2 R25.2 R26.1 R27.2 R28.2 R35.1 R36.1 R37.1 R38.1 R51.1 R52.2 U1.9 U1.71 U1.84 U1.93 U1.107 U1.121 U1.143 U1.159 U1.170 U7.21 U7.22 U7.23 | length 16164.5
  Top Layer w10: U7.21 U7.22 ; 1732.6,3928.8 U7.22 ; U7.23 1757.72,4034.18 U7.22 ; 2379.2,2200.6 U1.170 ; C26.2@2435,2746.4 2445,2746.4 2459,2732.4 U1.143@2518.6,2732.4 ; U1.159 2565.7,2417.1 v1(2585,2436.4) ; U1.170@2519.1,2200.8 2563.8,2200.8 v1@2579.4,2216.4 ; U1.143@2519.2,2731.8 2604.7,2731.8 ; v1(2740,2086.4) 2740,2062.16 2749.3,2052.86 U1.9 ; 2795,3051.89 2808,3038.89 2808,3002.1 U1.121 2808.3,2948.4 ; C28.2@3075,3091.4 3083.6,3082.8 3083.6,3002.1 U1.107 ; U1.107@3083.6,3001.5 3083.6,2947.31 3084.9,2946.01 ; 3359.5,2950.9 U1.93 C29.2@3359.5,3071.9 ; 3421.2,2850.2 U1.84 C22.2@3601.2,2850.2 ; 3462.1,2594.3 U1.71 C30.2@3677.1,2594.3
  Top Layer w15: P3.1 1600,3121.4 R51.1 R52.2 ; 1732.6,3928.8 1750,3911.4 v1(1855,3911.4) C4.1 1925,4181.4 1925,4331.4 P7.1 P7.2 P7.3 ; v1(1865,1921.4) 1865,1651.4 1890,1626.4 2000,1626.4 2030,1656.4 2185,1656.4 ; R38.1 R37.1 2185,1656.4 ; R35.1 R36.1 2185,1656.4 ; v1(2310,2131.4) 2379.2,2200.6 ; R3.1 2345,4291.4 P7.3 ; v1(2530,3856.4) OSC1.1@2635,3856.4 ; v1@2579.4,2216.4 v1(2590,2216.4) ; 2604.7,2731.4 v1(2806,2731.4) 2970,2895.4 ; 2795,3051.89 C27.2 ; 2808.3,2948.4 2861.3,2895.4 2970,2895.4 ; 3084.9,2946.01 3034.29,2895.4 ; 3359.5,2950.9 3340,2931.4 ; C29.2@3359.5,3071.9 C29.2 3275,3156.4 3275,3226.4 2816.1,3685.3 OSC1.4 OSC1.1@2635,3856.4 ; 3462.1,2594.3 3421.2,2635.2 3421.2,2850.2 3340,2931.4 ; C22.2@3601.2,2850.2 C22.2 ; C30.2@3677.1,2594.3 C30.2 ; R28.2@4025,3986.4 R28.2 R24.2 R25.2 R26.1 R27.2 R23.2 2755,3986.4 OSC1.1 OSC1.1@2635,3856.4 ; FB2.1 4709.08,4711.4 2605,4711.4 P7.4 P7.3 ; 2970,2895.4 3034.29,2895.4 ; 3034.29,2895.4 3068.29,2861.4 3270,2861.4 3340,2931.4
  Bottom Layer w15: P3.1 1590,3036.4 1590,2196.4 v1(1865,1921.4) 2100,1921.4 v1(2310,2131.4) ; R2.2 R1.2 1855,3781.4 v1(1855,3911.4) 2475,3911.4 v1(2530,3856.4) ; v1(2590,2216.4) 2635,2216.4 C24.2 2740,2321.4 v1(2780,2321.4) ; C25.2 2635,2436.4 v1(2585,2436.4) 2585,2476.4 2675,2566.4 ; v1(2740,2086.4) 2735,2086.4 2730,2091.4 2750,2111.4 C23.2@2780,2111.4 ; C23.2 2785,2066.4 2815,2036.4 2855,2036.4 2885,2066.4 2885,2256.4 2820,2321.4 v1(2780,2321.4) ; v1(2806,2731.4) 2806,2697.4 2675,2566.4 ; 2675,2566.4 2780,2461.4 v1(2780,2321.4)
+D5.0V: C1.2 C2.2 C3.1 FB4.1 P6.1 P6.2 P6.3 P6.4 P11.1 U7.2 U7.3 U7.10 U7.11 | length 5373.6
  Top Layer w10: 1531.02,4485.38 U7.11 U7.10 ; U7.3 U7.2 1757.99,4414.39
  Top Layer w15: P11.1 1510,4486.4 1530,4486.4 ; 1531.02,4485.38 1530,4486.4 ; 1757.99,4414.39 1795,4451.4 P6.2 ; FB4.1 4994.08,4741.4 2185,4741.4 P6.4 P6.3 P6.2 ; 1530,4486.4 1630,4486.4 P6.1 P6.2
  Bottom Layer w15: P11.1@1440,4551.4 1440,4526.4 1445,4521.4 1399.5,4475.9 1399.5,4151.9 C3.1 1480,4111.4 C2.2 C1.2
/RST_SWITCH: RESET.2 U7.6 | length 1241.6
  Top Layer w10: U7.6 1660,4301.89 v1(1660,4386.4) ; RESET.2 2420.91,4056.4 v1(2545,4056.4)
  Bottom Layer w10: v1(1660,4386.4) 1930,4386.4 2260,4056.4 v1(2545,4056.4)
ADCINA0: C46.2 R42.2 U1.42 | length 2290.4
  Top Layer w10: U1.42@3397.8,2008.6 3397.8,1923.6 3460,1861.4 4705,1861.4 C46.2 R42.2
ADCINA1: C47.2 R43.2 U1.41 | length 2234.1
  Top Layer w10: U1.41@3378.1,2008.6 3378.1,1913.3 3451,1840.4 4924,1840.4 C47.2 R43.2
ADCINA2: C48.2 R44.2 U1.40 | length 2165
  Top Layer w10: U1.40@3358.4,2008.6 3358.4,1908 3445,1821.4 4766.97,1821.4 4831.97,1756.4 C48.2 R44.2
ADCINA3: C49.2 R45.2 U1.39 | length 2285.8
  Top Layer w10: U1.39@3338.7,2008.6 3338.7,1907.7 3342.4,1904 3342.4,1901.37 3447.37,1796.4 4769.34,1796.4 5049.34,1516.4 C49.2 R45.2
ADCREFIN: pad.13 U1.54 | length 173.3
  Top Layer w10: U1.54@3510,2258.6 3587.8,2258.6 3620,2226.4 pad.13
ADCREFM: C45.1 U1.55 | length 340.7
  Top Layer w10: U1.55@3510,2278.3 3595,2278.3 ; 3595,2277.2 3596.1,2277.2 3731.9,2141.4 3745,2141.4 C45.1
ADCREFP: C44.1 U1.56 | length 301
  Top Layer w10: U1.56 3604.37,2299 3681.97,2221.4 C44.1
ADCRESEXT: R40.2 U1.57 | length 277.7
  Top Layer w10: U1.57@3510,2317.7 3761.3,2317.7 R40.2
ADS_CSN: *.5 U1.73 | length 1208.5
  Top Layer w10: U1.73 4022.87,2633.7 4496.21,3107.04 4519.65,3107.04 *.5
ADS_DCLK: *.7 U1.72 | length 1238.8
  Top Layer w10: U1.72 3902.4,2614 v1(3910,2606.4) ; v1(4110,2606.4) 4110,2669.65 4496.21,3055.86 4519.65,3055.86 *.7
  Bottom Layer w10: v1(3910,2606.4) v1(4110,2606.4)
ADS_DOUT: *.6 U1.69 | length 1270.7
  Top Layer w10: U1.69 3513.9,2552.1 3614.3,2552.1 3660,2506.4 3921.16,2506.4 4496.21,3081.45 4519.65,3081.45 *.6
AGND: "MIC AMP.3" "MIC AMP.4" *.3 *.4 C6.2 C7.1 C8.1 C9.2 C10.1 C11.1 C40.2 C44.2 C45.2 C46.1 C47.1 C48.1 C49.1 C50.2 C51.1 C52.1 FB3.2 R10.1 R40.1 TL07.4 TL075.4 TRS.1 U1.32 U1.33 U1.35 U1.36 U1.37 U1.38 U1.43 U1.44 U1.46 U1.47 U1.48 U1.49 U1.50 U1.51 U1.52 U1.53 U1.58 U2.4 U3.4 | length 19478.5
  Top Layer w10: U1.33@3220.6,2008.6 3201.7,2008.6 3201.7,1959.7 3205,1956.4 3270,1956.4 3280.7,1967.1 U1.36@3280.7,2008.6 ; U1.33 3221.7,2108.1 ; U1.35@3260,2008.6 U1.36@3280.7,2008.6 ; U1.43@3417.4,2008.6 3437.1,2008.6 3437.1,1939.3 ; U1.43 3418.5,2047.9 3403.5,2062.9 3336.61,2062.9 3320.2,2046.49 3320.2,2009.8 3319,2008.6 U1.36@3280.7,2008.6 ; 3451.7,2338.1 U1.58@3494.4,2338.1 ; U1.53@3510,2239 3510,2101.2 3512.5,2101.2 3512.5,2121.4 3670,2121.4 3690.2,2101.2 ; U1.58@3510,2337.4 3696,2337.4
  Top Layer w15: 3221.7,2108.1 3451.7,2338.1 ; 3437.1,1939.3 3480,1896.4 4600,1896.4 5160,2456.4 ; 3690.2,2101.2 3743,2048.4 3812,2048.4 C45.2 C44.2 R40.1 ; 3696,2337.4 3735,2376.4 3830,2376.4 R40.1 ; FB3.2 4509.61,4476.6 C6.2 4610,4231.21 C7.1 C8.1 v1(4600,4006.4) ; *.3 *.4 4828.39,3109.79 C40.2 5170,3451.4 5290,3451.4 ; v1(4910,4006.4) C11.1 C10.1 4920,4231.21 C9.2 ; C48.1 5280,1596.4 5410,1596.4 5430,1576.4 5430,1496.4 5405,1471.4 5255,1471.4 C49.1 5275,1361.4 5790,1361.4 U3.4 ; C46.1 5305,2221.4 5405,2221.4 5420,2206.4 5420,2121.4 5400,2101.4 5275,2101.4 C47.1 5295,1991.4 5785,1991.4 U2.4 5865,2241.4 5940,2316.4 5940,2401.4 5885,2456.4 5160,2456.4 ; C50.2 5235,4231.21 C51.1 C52.1 v1(5225,4001.4) 5225,3516.4 5290,3451.4 ; R10.1 5555,4031.4 5715,4031.4 5785,4101.4 5785,4256.4 6010,4481.4 6010,4581.4 6493,4581.4 TRS.1 ; TL07.4 5685,3508.77 5627.63,3451.4 5290,3451.4 ; R40.1 3990,2456.4 5160,2456.4
  Bottom Layer w15: v1(4600,4006.4) v1(4910,4006.4) 5220,4006.4 v1(5225,4001.4) 5315,4001.4 5420,4106.4 5420,4541.4 5530,4651.4 5940,4651.4 6010,4581.4 ; TL07.4 5640,3471.4 5640,2911.4 TL075.4 6130,2421.4 6385,2421.4 6385,2266.4 ; U3.4 6335,1436.4 6385,1486.4 6385,2266.4 ; U2.4 6190,2071.4 6385,2266.4 ; 6000,4481.4 6010,4481.4
EMU0_DSP: C42.2 JTAG_HEADER.13 R26.2 U1.85 | length 3109.6
  Top Layer w10: JTAG_HEADER.13 3440,4501.4 3440,4304.03 3480.63,4263.4 3623,4263.4 3675,4211.4 3675,4116.4 R26.2 ; U1.85 3618.5,2869.9 3649,2900.4 3934,2900.4 v1(3940,2906.4)
  Bottom Layer w10: JTAG_HEADER.13 3365,4551.4 3320,4506.4 3320,3559.03 3906,2973.03 3906,2947.17 3916,2937.17 3916,2915.63 3906.77,2906.4 v1(3940,2906.4)
EMU1_DSP: C43.2 JTAG_HEADER.14 R27.1 U1.86 | length 3077
  Top Layer w10: JTAG_HEADER.14 3390,4331.4 3505,4216.4 C43.2 3550,4116.4 R27.1 ; U1.86 3615.57,2889.6 3651.37,2925.4 3889,2925.4 v1(3890,2926.4)
  Bottom Layer w10: JTAG_HEADER.14 3390,4491.26 3432.53,4533.79 3432.53,4578.87 3417.47,4593.93 3337.53,4593.93 3270,4526.4 3270,3586.4 3890,2966.4 v1(3890,2926.4)
"Filter out": *.2 C39.2 R22.1 TL075.7 | length 1851.6
  Top Layer w10: *.2 4700.35,3061.35 4735.24,3061.35 4750.29,3076.4 4915,3076.4 5190,2801.4 5720,2801.4 TL075.7 ; R22.1 6000,3066.4 TL075.7 ; C39.2 TL075.7
GND: "LED PWR.2" C1.1 C2.1 C3.2 C4.2 C5.2 C12.2 C13.1 C14.1 C15.1 C16.1 C17.1 C18.1 C19.1 C20.1 C21.1 C22.1 C23.1 C24.1 C25.1 C26.1 C27.1 C28.1 C29.1 C30.1 C41.1 C42.1 C43.1 C53.1 FB3.1 JTAG_HEADER.4 JTAG_HEADER.6 JTAG_HEADER.8 JTAG_HEADER.10 JTAG_HEADER.12 OSC1.2 P3.8 P9.1 P9.2 P9.3 P9.4 P11.2 R31.2 R32.2 R33.2 R34.2 R41.2 RESET.1 S2.1 U1.3 U1.8 U1.14 U1.22 U1.30 U1.60 U1.70 U1.83 U1.92 U1.103 U1.104 U1.106 U1.108 U1.118 U1.120 U1.125 U1.140 U1.144 U1.147 U1.155 U1.160 U1.166 U1.171 U7.1 U7.7 U7.9 U7.12 U7.13 U7.24 | length 25473.5
  Top Layer w10: U7.1@1581.42,4230.48 U7.9 ; U7.1@1631.81,4180.08 U7.7 ; 2381,2710.4 2469.56,2710.4 2471.56,2712.4 U1.144 2594,2712.4 ; 2385.3,2791.1 2508.3,2791.1 2508.6,2791.4 U1.140@2504.05,2791.4 ; C12.2@2404,2397.4 U1.160 ; 2438.3,2278.1 2480.91,2278.1 2480.91,2279 2518.6,2279 U1.166 2790,2279.3 ; 2454.09,2621.4 2468.5,2635.81 2468.5,2650.91 2470.89,2653.3 U1.147 ; 2473.9,2475.3 2473.9,2487.69 2481.81,2495.6 U1.155@2518.6,2495.6 ; U1.171 2560.5,2180.9 v1(2590,2151.4) ; U1.160@2519.2,2397.1 2580,2397.1 ; 2615,1951.4 2631.1,1967.5 U1.3 2631.1,2119.1 ; v1(2700,2091.4) 2700,2075.99 2729.3,2046.69 U1.8@2729.3,2009.9 ; U1.125 2729.6,3141.8 ; 2820,1946.4 2838.2,1964.6 2847.4,1964.6 2847.4,2069 ; U1.120 2828,3049.81 2833.5,3055.31 ; U1.120@2828.3,3001.5 2828.3,2958.1 2870,2916.4 ; 2856.5,3055.81 2867.4,3044.91 U1.118 ; 2867.6,2949.1 U1.118@2867.6,3001.8 ; 2975,1946.4 2993.2,1964.6 2996.99,1964.6 3004.9,1972.51 3004.9,2009.3 U1.22 ; 3035,3125.49 3035,3076.4 3039,3072.4 3039,3071.85 3045.44,3065.4 3046,3065.4 3063.9,3047.5 3063.9,3002.1 U1.108 ; 3063.9,2954.71 U1.108@3063.9,3001.5 ; C28.1@3080,3211.4 3080,3176.4 3104,3152.4 3104.56,3152.4 3111,3145.96 3111,3145.4 3113.5,3142.9 3113.5,3055.81 3103.6,3045.91 U1.106 3103.6,2957.8 ; U1.104 U1.103@3161.5,3001.8 ; 3161.5,2957.9 U1.103@3161.5,3001.8 ; 3161.5,3127.9 U1.103@3161.5,3001.8 ; U1.30@3162.9,2009.9 3162.9,2117.7 ; U1.30@3163.7,2009.6 3163.7,1962.7 3180,1946.4 ; 3355,2377.5 U1.60@3492.9,2377.5 ; U1.92 3381,3003.6 3381,3052.4 3383.5,3054.9 3383.5,3137.9 ; 3456.9,2574.6 U1.70 3622.71,2574.6 3665.91,2531.4 ; U1.60 3616.3,2377.7 ; U1.83 3559.11,2830.5 3576.5,2813.11 3576.5,2800.81 3585.91,2791.4
  Top Layer w15: P3.8 1405,4115.91 1452.99,4163.9 1370,4246.89 1370,4561.4 1405,4596.4 1495,4596.4 1540,4551.4 P11.2@1540,4526.4 ; U7.1@1581.42,4230.48 1631.81,4180.08 U7.1@1647.99,4163.9 ; S2.1 1540,2311.4 R31.2 R32.2 R33.2 R34.2 1650,1361.4 2285,1361.4 2625,1701.4 C13.1 2585,1856.4 2585,1940.49 2595.91,1951.4 2615,1951.4 ; C4.2 C5.2 2260,4166.4 2670,4166.4 2735,4231.4 2735,4506.4 P9.2 ; 2381,2710.4 C26.1@2345,2746.4 ; 2385.3,2791.1 2345.6,2751.4 C26.1 C26.1@2345,2746.4 ; C12.2@2404,2397.4 C12.2 ; 2438.3,2278.1 2400,2316.4 C12.2 ; 2454.09,2621.4 2395.91,2621.4 2364.21,2653.1 2343.3,2653.1 C19.1 2345,2681.4 C26.1@2345,2746.4 ; 2473.9,2475.3 C12.2 ; 2580,2397.1 2580,2366.4 v1(2585,2361.4) ; P9.1 P9.2 ; 2594,2712.4 2768.6,2537.8 3421.4,2537.8 ; 2629.8,2119.1 2790,2279.3 3317.4,2279.3 3320.3,2276.4 ; v1@2695.41,2091.4 v1(2700,2091.4) ; 2729.6,3141.8 C21.1 2695,3186.4 C27.1 2833.5,3147.9 2833.5,3055.31 ; P9.3 P9.2 ; 2820,1946.4 2820,1861.4 C14.1 C15.1 ; v1(2835,2081.4) 2847.4,2069 ; 2856.5,3055.81 2856.5,3142.9 C53.1 ; 2867.6,2949.1 2900.3,2916.4 ; 2870,2916.4 2900.3,2916.4 ; P9.4 2890,4186.4 2765,4061.4 RESET.1 2630,4061.4 OSC1.2 2435,3791.4 2615,3611.4 2775,3611.4 C18.1 3161.5,3127.9 ; 2975,1946.4 2975,1861.4 C15.1 ; 3035,3125.49 2995,3165.49 C20.1 3010,3196.4 C28.1 ; 3063.9,2954.71 3025.59,2916.4 2900.3,2916.4 ; 3103.6,2957.8 3110,2951.4 3155,2951.4 3161.5,2957.9 ; 3161.6,2117.7 3320.3,2276.4 ; 3180,1946.4 3180,1856.4 C16.1 C15.1 ; 3383.5,3137.9 C29.1 3755,3176.4 3985,2946.4 ; 3456.9,2573.3 3421.4,2537.8 ; 3585.91,2791.4 3665,2791.4 3704.1,2830.5 3949.1,2830.5 3985,2866.4 3985,2946.4 ; 3616.3,2377.7 C17.1 ; 3665.91,2531.4 3735,2531.4 3778.2,2574.6 3861.8,2574.6 v1(3875,2561.4) ; JTAG_HEADER.4 JTAG_HEADER.6 JTAG_HEADER.8 JTAG_HEADER.10 ; R41.2 C41.1 C42.1 C43.1 3550,4391.4 JTAG_HEADER.12 JTAG_HEADER.10 ; 3320.3,2276.4 3355,2311.1 3355,2377.5 3355,2471.4 3421.4,2537.8 ; JTAG_HEADER.10 3645,4506.4 3645,4581.4 3710,4646.4 4335,4646.4 FB3.1 4350,4551.4 4190,4391.4 v1(4190,3151.4) 3985,2946.4
  Bottom Layer w15: P11.2@1540,4551.4 1540,4526.4 1545,4521.4 1460,4436.4 C3.2 1605,4226.4 C2.1 C1.1 ; P11.2 1595,4601.4 2540,4601.4 P9.1 ; v1(2585,2361.4) 2640,2361.4 C25.1 ; v1(2590,2151.4) 2640,2151.4 C24.1 v1(2700,2091.4) 2700,2141.4 2784.25,2225.65 2835,2174.9 v1(2835,2081.4) ; P9.3 P9.4 3190,4551.4 3280,4641.4 3460.85,4641.4 3533.03,4569.22 3533.03,4568.52 3535,4566.54 3535,4496.4 JTAG_HEADER.12 ; v1(3875,2561.4) 4130,2561.4 4190,2621.4 v1(4190,3151.4)
GPIO4: U1.11
GPIO5: U1.12
GPIO6: U1.13
GPIO7: U1.16
GPIO8: U1.17
GPIO9: U1.18
GPIO10: U1.19
GPIO11: U1.20
GPIO12: U1.21
GPIO13: U1.24
GPIO14: U1.25
GPIO15: U1.26
GPIO16: U1.27
GPIO17: U1.28
GPIO18: U1.62
GPIO19: U1.63
GPIO20: U1.64
GPIO21: U1.65
GPIO22: U1.66
GPIO23: U1.67
GPIO24: U1.68
GPIO32: U1.74
GPIO33: U1.75
GPIO48: U1.88
GPIO49: U1.89
GPIO50: U1.90
GPIO51: U1.91
GPIO52: U1.94
GPIO53: U1.95
GPIO54: U1.96
GPIO55: U1.97
GPIO56: U1.98
GPIO57: U1.99
GPIO58: U1.100
GPIO59: U1.110
GPIO60: U1.111
GPIO61: U1.112
LED_ENABLE: P2.2 U1.6 | length 715.6
  Top Layer w10: U1.6@2689.1,2008.6 2690,2007.7 2690,1881.4 2750,1821.4 2750,1431.4 P2.2
LightSense: P4.2 U3.5 | length 499
  Bottom Layer w10: U3.5 6007.5,1878.9 P4.2
LOCK_ENABLE: P1.2 U1.10 | length 4250.3
  Top Layer w10: U1.10@2767.8,2008.6 2767.8,1938.6 2795,1911.4 2795,1596.4 v1(2845,1546.4)
  Bottom Layer w10: v1(2845,1546.4) 4890,1546.4 5605,2261.4 P1.2
MagSense: P1.1 U2.5 | length 444.1
  Bottom Layer w10: U2.5 5875,2361.4 P1.1
"Mic out": "MIC AMP.7" R8.1 R11.2 | length 1138.3
  Top Layer w10: R11.2 5490,3986.4 v1(5935,3986.4)
  Bottom Layer w10: 5710,4381.4 5810,4281.4 5810,4111.4 R8.1 v1(5935,3986.4)
NetC31_1: C31.1 R6.1 TRS.4 | length 390.3
  Bottom Layer w10: C31.1 R6.1 6323.75,4359.65 TRS.4
NetC31_2: C31.2 R7.2 | length 156.2
  Bottom Layer w10: R7.2 C31.2
NetC32_1: C32.1 C33.1 R11.1 R12.1 | length 531.6
  Top Layer w10: C32.1 5435,3606.4 R12.1 R11.1 5530,3746.4 C33.1
NetC32_2: C32.2 R13.2 TL07.2 | length 376.8
  Top Layer w10: C32.2 5560,3516.4 R13.2 5630,3586.4 5630,3661.4 TL07.2
NetC33_2: C33.2 R13.1 R14.2 TL07.1 | length 998.9
  Top Layer w10: R13.1 5565,3661.4 5685,3781.4 TL07.1 ; C33.2 5585,3816.4 TL07.1 ; R14.2 6190,3896.4 5765,3896.4 TL07.1
NetC34_1: C34.1 C35.1 R14.1 R15.2 | length 567.5
  Top Layer w10: C35.1 6177.5,3746.4 R15.2 ; C34.1 6245,3606.4 R15.2 ; R14.1 6245,3751.4 R15.2
NetC34_2: C34.2 R16.2 TL07.6 | length 301.4
  Top Layer w10: TL07.6 6080,3521.4 R16.2 6240,3521.4 C34.2
NetC35_2: C35.2 R16.1 R17.2 TL07.7 | length 1190.7
  Top Layer w10: R17.2 5450,3296.4 5565,3296.4 TL07.7 ; R16.1 6000,3716.4 TL07.7 ; C35.2 TL07.7
NetC36_1: C36.1 C37.1 R17.1 R18.2 | length 531.6
  Top Layer w10: C36.1 5435,2956.4 R18.2 R17.1 5530,3096.4 C37.1
NetC36_2: C36.2 R19.2 TL075.2 | length 376.8
  Top Layer w10: C36.2 5560,2866.4 R19.2 5630,2936.4 5630,3011.4 TL075.2
NetC37_2: C37.2 R19.1 R20.2 TL075.1 | length 1014.8
  Top Layer w10: R19.1 5565,3016.4 5685,3136.4 TL075.1 ; C37.2 5585,3166.4 TL075.1 ; R20.2 6185,3251.4 5750,3251.4 5685,3186.4 TL075.1
NetC38_1: C38.1 C39.1 R20.1 R21.2 | length 567.5
  Top Layer w10: C39.1 6177.5,3096.4 R21.2 ; C38.1 6245,2956.4 R21.2 ; R20.1 6245,3101.4 R21.2
NetC38_2: C38.2 R22.2 TL075.6 | length 301.4
  Top Layer w10: TL075.6 6080,2871.4 R22.2 6110,2866.4 C38.2
"NetDSP BOOT_1": "DSP BOOT.1" R31.1 | length 209
  Top Layer w10: R31.1 1740,1841.4 1810,1771.4
"NetDSP BOOT_3": "DSP BOOT.3" R32.1 | length 198.6
  Top Layer w10: R32.1 1765,1716.4 1810,1671.4
"NetDSP BOOT_5": "DSP BOOT.5" R33.1 | length 188.3
  Top Layer w10: R33.1 1790,1591.4 1810,1571.4
"NetDSP BOOT_7": "DSP BOOT.7" R34.1 | length 180
  Top Layer w10: R34.1 1810,1471.4
NetJTAG_HEADER_5: JTAG_HEADER.5 R28.1 | length 852.1
  Top Layer w10: JTAG_HEADER.5 3855,4616.4 4035,4616.4 4076,4575.4 4076,4132.4 R28.1
"NetLED PWR_1": "LED PWR.1" R3.2 | length 150
  Top Layer w10: R3.2 2645,4231.4
"NetMIC AMP_1": "MIC AMP.1" "MIC AMP.2" | length 100
  Top Layer w10: 6010,4281.4 6010,4381.4
"NetMIC AMP_6": "MIC AMP.6" R7.1 R8.2 | length 541.3
  Bottom Layer w10: 5710,4481.4 5855,4336.4 R8.2 R7.1
NetOSC1_3: OSC1.3 R30.1 | length 230.2
  Top Layer w10: R30.1 2313.9,3806.4 OSC1.3
NetP3_3: P3.3 R51.2 | length 297.1
  Top Layer w10: P3.3 1590,3221.4 R51.2
NetP3_5: P3.5 R52.1 S2.2 | length 988.7
  Top Layer w10: P3.5 1635,3321.4 R52.1 1890,3066.4 1925,3066.4 1980,3011.4 1980,2951.4 S2.2
NetR5_2: R5.2 TRS.2 | length 286.6
  Bottom Layer w10: TRS.2@6475,4381.4 TRS.2 6520,4196.4 R5.2
NetR39_1: R39.1 U1.138 | length 156.5
  Top Layer w10: U1.138 2599.1,2830.5 v1(2600,2831.4)
  Bottom Layer w10: v1(2600,2831.4) R39.1
NetR42_1: R42.1 U2.6 U2.7 | length 436.1
  Top Layer w10: R42.1 5590,2296.4 U2.7 U2.6
NetR43_1: R43.1 U2.1 U2.2 | length 311.2
  Top Layer w10: R43.1 5550,2056.4 U2.1 U2.2
NetR44_1: R44.1 U3.6 U3.7 | length 434
  Top Layer w10: R44.1 5595,1666.4 U3.7 U3.6
NetR45_1: R45.1 U3.1 U3.2 | length 309.1
  Top Layer w10: R45.1 5370,1436.4 U3.1 U3.2
PG1: R1.1 U7.19 | length 315.1
  Top Layer w10: U7.19 1657.01,3964.39 v1(1680,3941.4)
  Bottom Layer w10: v1(1680,3941.4) 1680,3806.4 R1.1
PressureSense: P5.1 U3.3 | length 564.9
  Bottom Layer w10: U3.3 5825,1496.4 P5.1
PWM_FAN: P2.1 U1.5 | length 682.3
  Top Layer w10: U1.5@2669.4,2008.6 2669.4,1872 2726,1815.4 2726,1355.4 P2.1
PWM_PUMP: P5.2 U1.7 | length 4059.3
  Top Layer w10: U1.7@2708.8,2008.6 2708.8,1892.6 2775,1826.4 2775,1556.4 v1(2815,1516.4)
  Bottom Layer w10: v1(2815,1516.4) 4900,1516.4 4980,1596.4 P5.2
TCK_DSP: JTAG_HEADER.9 JTAG_HEADER.11 R23.1 U1.87 | length 3325.9
  Top Layer w10: R23.1 3315,4146.4 3315,4556.4 3355,4596.4 3445,4596.4 JTAG_HEADER.11 JTAG_HEADER.9 ; U1.87 3607.8,2909.2 3650,2951.4 v1(3835,2951.4)
  Bottom Layer w10: JTAG_HEADER.11 3431.47,4609.93 3297.06,4609.93 3220,4532.87 3220,3561.4 3830,2951.4 v1(3835,2951.4)
TDI_DSP: JTAG_HEADER.3 R24.1 U1.76 | length 3347.9
  Top Layer w10: U1.76 3891.3,2692.7 v1(3990,2791.4) ; JTAG_HEADER.3 3935,4596.4 4025,4596.4 4060,4561.4 4060,4241.4 R24.1
  Bottom Layer w10: JTAG_HEADER.3 3890,4551.47 3954.93,4616.4 4060,4616.4 4085,4591.4 4085,2886.4 v1(3990,2791.4)
TDO_DSP: JTAG_HEADER.7 U1.77 | length 2741
  Top Layer w10: U1.77 3861,2712.4 v1(3940,2791.4)
  Bottom Layer w10: JTAG_HEADER.7 3732.53,4508.87 3907.62,4508.87 3947.47,4548.73 3947.47,4586.31 3955.09,4593.93 4047.47,4593.93 4047.47,2898.87 v1(3940,2791.4)
TempSense: P4.1 U2.3 | length 578.3
  Bottom Layer w10: U2.3 5857.5,1978.9 P4.1
TMS_DSP: JTAG_HEADER.1 R25.1 U1.79 | length 2876.3
  Top Layer w10: U1.79 3800.4,2751.8 v1(3840,2791.4) ; R25.1 3805,4076.4 3880,4151.4 3945,4151.4 4040,4246.4 4040,4501.4 JTAG_HEADER.1
  Bottom Layer w10: v1(3840,2791.4) 3917,2868.4 3949.53,2868.4 3970,2888.87 3970,4411.26 3947.47,4433.79 3947.47,4508.87 JTAG_HEADER.1
TRSTn_DSP: C41.2 JTAG_HEADER.2 R41.1 U1.78 | length 2491.9
  Top Layer w10: U1.78 3829.3,2732.1 3888.6,2791.4 v1(3890,2791.4) ; C41.2 R41.1 3990,4286.4 JTAG_HEADER.2
  Bottom Layer w10: v1(3890,2791.4) 3895.15,2791.4 3990,2886.25 JTAG_HEADER.2
UART_RXD: P3.7 U1.113 | length 1803.8
  Top Layer w10: v1(2890,3356.4) 2900,3356.4 2956,3300.4 2956,3059.85 2965.8,3050.05 U1.113
  Bottom Layer w10: P3.7 2825,3421.4 v1(2890,3356.4)
UART_TXD: P3.2 U1.114 | length 1867.1
  Top Layer w10: v1(2888,3291.4) 2940,3239.4 2940,3053.22 2946.1,3047.12 U1.114
  Bottom Layer w10: P3.2 1455,3171.4 1665,3171.4 1785,3291.4 v1(2888,3291.4)
XA0: U1.151
XA1: U1.152
XA2: U1.153
XA3: U1.156
XA4: U1.157
XA5: U1.158
XA6: U1.161
XA7: U1.162
XA8: U1.163
XA9: U1.164
XA10: U1.165
XA11: U1.168
XA12: "DSP BOOT.2" R35.2 U1.169 | length 890
  Top Layer w10: 1910,1771.4 1980,1841.4 R35.2 2095,2006.4 2307.9,2219.3 U1.169@2517.8,2219.3
XA13: "DSP BOOT.4" R36.2 U1.172 | length 880.8
  Top Layer w10: 1910,1671.4 1955,1716.4 R36.2 2146,1767.4 2146,1809.85 2144,1811.85 2144,1880.4 2424.8,2161.2 U1.172
XA14: "DSP BOOT.6" R37.2 U1.173 | length 1363.2
  Top Layer w10: 1910,1571.4 1935,1596.4 R37.2 2140,1551.4 2140,1431.4 2155,1416.4 2220,1416.4 2250,1446.4 2250,1956.4 2435.1,2141.5 U1.173
XA15: "DSP BOOT.8" R38.2 U1.174 | length 1327.8
  Top Layer w10: 1910,1471.4 R38.2 2095,1401.4 2115,1381.4 2275,1381.4 2275,1951.4 2445.4,2121.8 U1.174
XA16: U1.175
XA17: U1.176
XA18: U1.1
XA19: U1.2
XCLKIN: R30.2 U1.105 | length 1302.4
  Top Layer w10: R30.2 2395,3576.4 2775,3576.4 3130,3221.4 3130,3046.15 3123.3,3039.45 U1.105
XCLKOUT: pad.14 R39.2 | length 727.7
  Bottom Layer w10: pad.14 2505,2571.4 R39.2
XD0: U1.136
XD1: U1.135
XD2: U1.134
XD3: U1.133
XD4: U1.132
XD5: U1.131
XD6: U1.130
XD7: U1.129
XD8: U1.128
XD9: U1.127
XD10: U1.124
XD11: U1.123
XD12: U1.122
XD13: U1.119
XD14: U1.116
XD15: U1.115
XRDn: U1.149
XREADY: U1.142
XRSn: R2.1 U1.80 U7.18 | length 3429.7
  Top Layer w10: v1(1610,3941.4) 1631.81,3963.21 U7.18 ; U1.80 3770,2771.4 v1(3790,2791.4)
  Bottom Layer w10: v1(1610,3941.4) 1610,3786.4 R2.1 1535,3711.4 1535,3611.4 3115,3611.4 3790,2936.4 v1(3790,2791.4)
XRWn: U1.148
XWEn: U1.137
XZCS0n: U1.145
XZCS6n: U1.141
XZCS7n: U1.150
pads on no net: P3.4 P3.6 S2.3 S2.4 TRS.3 TRS.5 U1.81 U1.82 U1.102 U7.4 U7.5 U7.8 U7.17 U7.20

## Keep-outs
Keep-Out Layer:
  the board outline again, w10

## Text inside footprints (layer, text, board x,y; h text height)
"DSP BOOT": Top Overlay "8" at 1890,1411.4 h50 r270; Top Overlay "7" at 1790,1411.4 h50 r270; Top Overlay "1" at 1790,1851.4 h50 r270; Top Overlay "2" at 1890,1871.4 h50 r270
JTAG_HEADER: Top Overlay "13" at 3310,4571.4 h50 r180; Top Overlay "14" at 3310,4471.4 h50 r180; Top Overlay "1" at 4110,4571.4 h50 r180; Top Overlay "2" at 4110,4471.4 h50 r180
P3: Top Overlay "8" at 1425,3481.4 h50 r90; Top Overlay "7" at 1525,3481.4 h50 r90; Top Overlay "1" at 1525,3041.4 h50 r90; Top Overlay "2" at 1425,3021.4 h50 r90